# EAGLE board SMART_PJU (EAGLE 9.6.2)
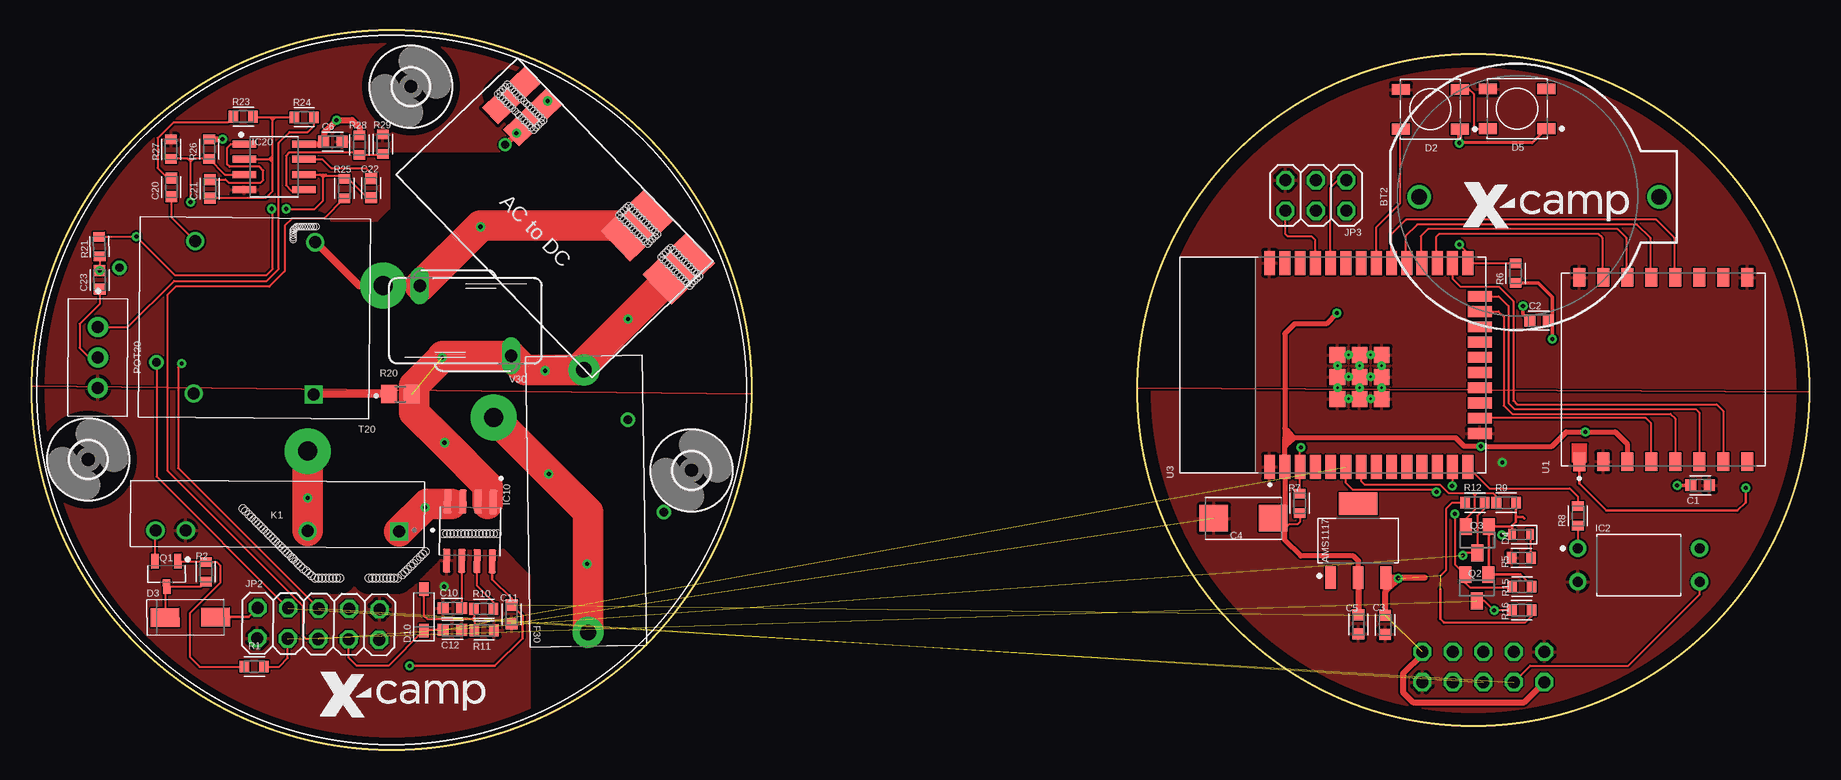
[diagram p0: board, top side]
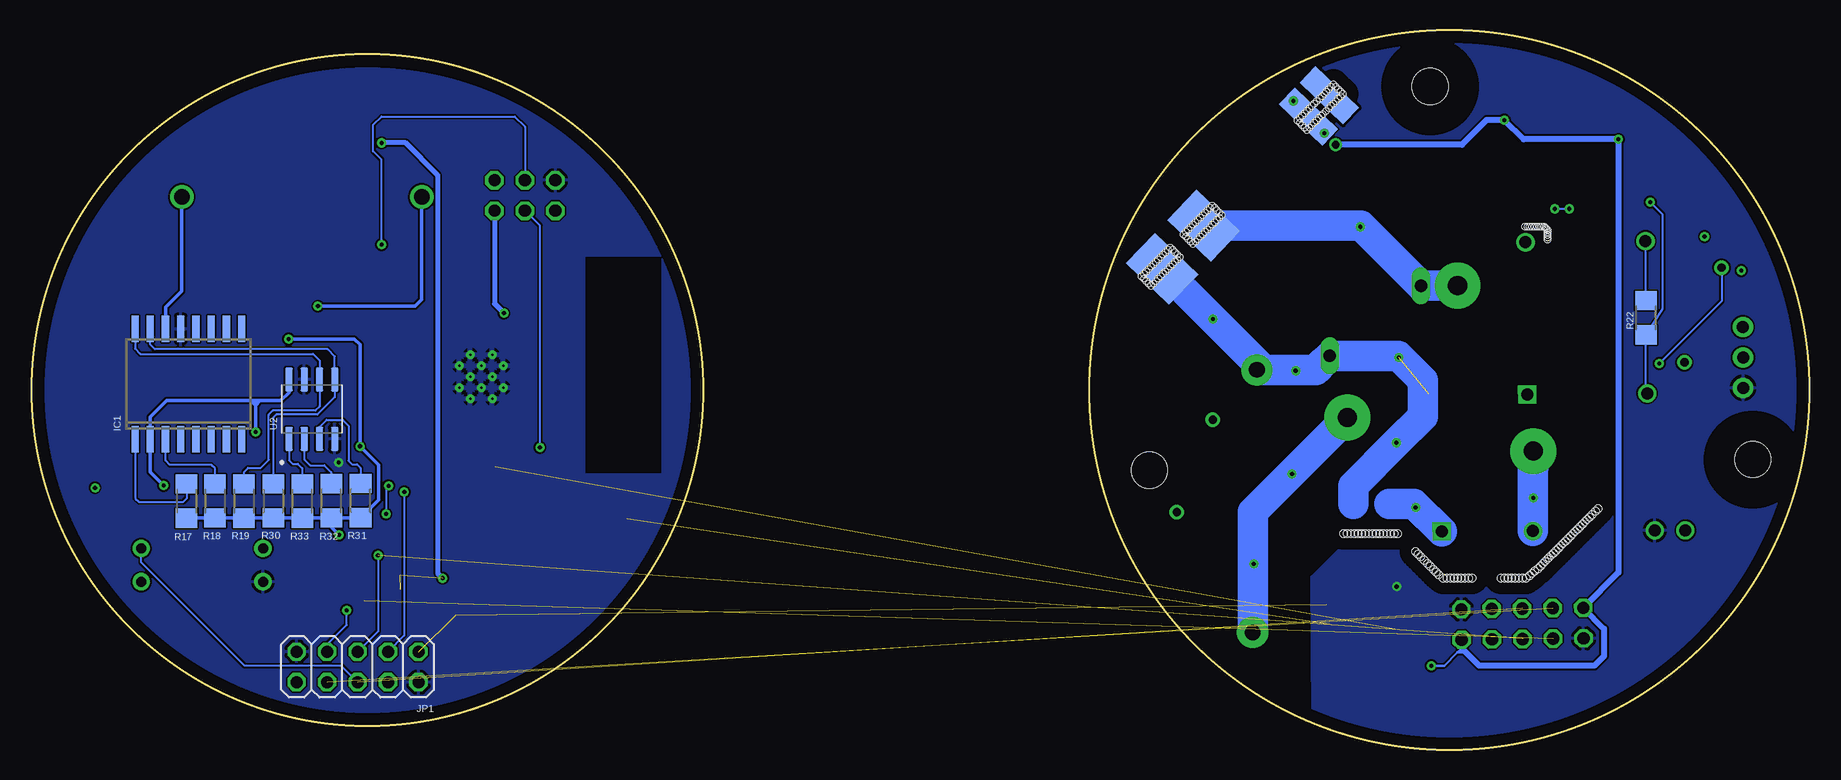
[diagram p1: board, bottom side, seen from below]

Size 148.19 x 60.03 mm. Coordinates in mm from the lower left corner, seen from the top.
Outline: circle at 30.02,30.02 radius 30.02
Outline: circle at 120.19,30.01 radius 28
Copper layers (1*16): Top 0.035mm / dielectric 1.5mm / Bottom 0.035mm
Design rules "default": minimum track width 6mil, minimum drill 0.35mm, track to track 6mil, track to pad 6mil, pad to pad 6mil, via to via 6mil, smd to smd 6mil, copper to edge 40mil, drill to drill 6mil, minimum pad ring 10mil, minimum via ring 8mil, stop-mask expansion 4mil, vias tented up to drill 0mil, thermal gap 10mil
Holes 0.6 mm at 19.52,18.22 19.72,18.02 19.92,17.82 20.12,17.62 20.32,17.42 20.52,17.22 20.72,17.02 20.92,16.82 21.12,16.62 21.32,16.42 21.52,16.22 21.72,16.02 21.84,15.91 22.02,15.72 22.22,15.52 22.42,15.32 22.62,15.12 22.92,14.92 23.12,14.72 23.32,14.52 23.62,14.32 23.92,14.32 24.22,14.32 24.52,14.32 24.82,14.32 25.12,14.32 25.42,14.32 25.72,14.32 28.12,14.32 28.42,14.32 28.72,14.32 29.02,14.32 29.32,14.32 29.62,14.32 29.92,14.32 30.22,14.32 30.52,14.32 30.92,14.62 31.12,14.82 31.32,15.02 31.62,15.32 31.82,15.52 32.12,15.82 32.42,16.12 32.62,16.32 32.82,16.52 17.62,20.12 17.82,19.92 18.12,19.62 18.32,19.42 18.52,19.22 18.72,19.02 18.92,18.82 19.12,18.62 19.32,18.42 34.32,18.02 34.62,18.02 34.92,18.02 35.22,18.02 35.52,18.02 35.82,18.02 36.12,18.02 36.42,18.02 36.72,18.02 37.02,18.02 37.32,18.02 37.62,18.02 37.92,18.02 38.22,18.02 38.52,18.02 38.82,18.02
Holes 0.5 mm at 52.47,41.1 52.67,40.9 52.87,40.7 53.07,40.5 53.27,40.3 53.47,40.1 53.67,39.9 52.67,41.3 52.87,41.5 53.07,41.7 53.27,41.9 53.47,41.7 53.67,41.5 53.87,41.3 54.07,41.1 54.27,40.9 54.47,40.7 54.67,40.5 54.87,40.3 55.07,40.1 55.27,39.9 55.47,39.7 55.67,39.5 53.87,39.7 54.07,39.5 54.27,39.3 54.47,39.1 54.67,38.9 54.87,38.7 55.07,38.9 55.27,39.1 55.47,39.3 48.97,44.6 49.17,44.4 49.37,44.2 49.57,44 49.77,43.8 49.97,43.6 50.17,43.4 49.17,44.8 49.37,45 49.57,45.2 49.77,45.4 49.97,45.2 50.17,45 50.37,44.8 50.57,44.6 50.77,44.4 50.97,44.2 51.17,44 51.37,43.8 51.57,43.6 51.77,43.4 51.97,43.2 52.17,43 50.37,43.2 50.57,43 50.77,42.8 50.97,42.6 51.17,42.4 51.37,42.2 51.57,42.4 51.77,42.6 51.97,42.8 38.87,54.7 39.07,54.5 39.27,54.3 39.47,54.1 39.67,53.9 39.87,53.7 40.67,52.9 39.07,54.9 39.27,55.1 39.47,55.3 39.67,55.5 39.87,55.3 40.07,55.1 40.27,54.9 41.07,54.1 41.27,53.9 41.47,53.7 41.67,53.5 41.87,53.3 42.07,53.1 42.27,52.9 42.47,52.7 42.67,52.5 40.87,52.7 41.07,52.5 41.27,52.3 41.47,52.1 41.67,51.9 41.87,51.7 42.07,51.9 42.27,52.1 42.47,52.3 40.05,53.51 40.3,53.26 40.56,53 40.42,54.72 40.62,54.52 40.82,54.32 21.82,42.54 21.82,42.74 21.82,42.94 21.82,43.14 21.82,43.34 21.92,43.44 22.02,43.54 22.12,43.64 22.32,43.64 22.52,43.64 22.72,43.64 22.92,43.64 23.12,43.64 23.32,43.64 23.52,43.64 23.72,43.64

## Footprints (pad centres in the part's own frame; a part is rotated, then mirrored left to right if it is on the bottom)
SOT230P700X170-4 = smd 1.86 x 0.898: 1 -3.075,2.3; 2 -3.075,0; 3 -3.075,-2.3 | smd 1.86 x 3.189: 4 3.075,0
BATTCOM_20MM_PTH = drill 1.3: 1 11.85,0; 2 -8.15,0
CAPC1608X85 = smd 0.921 x 0.97: 1 -0.775,0; 2 0.775,0
CAPM6032X280 = smd 2.368 x 2.204: 1 -2.471,0; 2 2.471,0
WS2812B = smd 1.5 x 0.9: 1 -2.45,1.65; 2 -2.45,-1.65; 3 2.45,-1.65; 4 2.45,1.65
DIOM5226X290N = smd 2.392 x 1.565: 1 -2.108,0; 2 2.108,0
LEDC1608X55N_FLAT-B = smd 0.612 x 0.912: A 0.75,0; C -0.75,0
SOD3715X135 = smd 1.127 x 0.784: 1 -1.722,0; 2 1.722,0
4527 = drill 1.3 pad 2.6: 1 -10.95,0; 2 10.95,0
3,0 = hole 3: 0,0
SO16W = smd 0.6 x 2.2: 1 -4.445,-4.6; 2 -3.175,-4.6; 3 -1.905,-4.6; 4 -0.635,-4.6; 5 0.635,-4.6; 6 1.905,-4.6; 7 3.175,-4.6; 8 4.445,-4.6; 9 4.445,4.6; 10 3.175,4.6; 11 1.905,4.6; 12 0.635,4.6; 13 -0.635,4.6; 14 -1.905,4.6; 15 -3.175,4.6; 16 -4.445,4.6
DIP1016W60P279L460H460Q4B = drill 0.854 pad 1.454: 1 -5.08,1.395; 2 -5.08,-1.395; 3 5.08,-1.395; 4 5.08,1.395
SOIC127P600X175-8N@1 = smd 1.97 x 0.6: 1 -2.475,1.905; 2 -2.475,0.635; 3 -2.475,-0.635; 4 -2.475,-1.905; 5 2.475,-1.905; 6 2.475,-0.635; 7 2.475,0.635; 8 2.475,1.905
SOIC127P600X175-8N = smd 1.969 x 0.592: 1 -2.474,1.905; 2 -2.474,0.635; 3 -2.474,-0.635; 4 -2.474,-1.905; 5 2.474,-1.905; 6 2.474,-0.635; 7 2.474,0.635; 8 2.474,1.905
2X05 = drill 1.016 octagon: 1 -5.08,-1.27; 2 -5.08,1.27; 3 -2.54,-1.27; 4 -2.54,1.27; 5 0,-1.27; 6 0,1.27; 7 2.54,-1.27; 8 2.54,1.27; 9 5.08,-1.27; 10 5.08,1.27
2X03 = drill 1.016 octagon: 1 -2.54,-1.27; 2 -2.54,1.27; 3 0,-1.27; 4 0,1.27; 5 2.54,-1.27; 6 2.54,1.27
SSR_G3MB-202P = drill 1 square: 1 -10.16,1.4 | drill 1: 2 -2.54,1.4; 3 7.62,1.4; 4 10.16,1.4
NEMA-7P = drill 0.7: DIM+ -22.7,10.2; DIM- -19.6,2.3; OPS1 19.7,-2.5; OPS2 22.7,-10.2 | drill 1.6 pad 3.81: L 8.5,-2.3; N -0.7,8.7; V -7,-5.1
PV36W = drill 1 pad 1.7: 1 0,0; 2 2.54,0; 3 5.08,0
AC-DC_3.5W(VER) = smd 1.9 x 5 bottom: 5V_B -7.2,3.8; GND_B -9.7,3.8 | smd 1.9 x 5: 5V_T -7.16,3.8; GND_T -9.7,3.8 | smd 3.5 x 5 bottom: L_B 10.4,3.8; N_B 5.4,3.8 | smd 3.5 x 5: L_T 10.4,3.8; N_T 5.4,3.8
SOT95P237X112-3N = smd 1.224 x 0.625: 1 -1.064,0.95; 2 -1.064,-0.95; 3 1.064,0
SOT23 = smd 1 x 1.4: 1 -0.95,-1.1; 2 0.95,-1.1; 3 0,1.1
RESC1608X60 = smd 0.799 x 0.974: 1 -0.815,0; 2 0.815,0
R1206 = smd 1.6 x 1.803: 1 -1.422,0; 2 1.422,0
R0805 = smd 1.3 x 1.5: 1 -0.95,0; 2 0.95,0
ZMPT101B = drill 1 square: 1 -5,6.35 | drill 1: 2 -5,-6.35; 3 5,-6.35; 4 5,6.35
RA-01H = smd 1.536 x 1: 1 -7.682,7; 2 -7.682,5; 3 -7.682,3; 4 -7.682,1; 5 -7.682,-1; 6 -7.682,-3; 7 -7.682,-5; 8 -7.682,-7; 9 7.682,-7; 10 7.682,-5; 11 7.682,-3; 12 7.682,-1; 13 7.682,1; 14 7.682,3; 15 7.682,5; 16 7.682,7
SOIC127P600X175-8N' = smd 1.97 x 0.6: 1 -2.475,1.905; 2 -2.475,0.635; 3 -2.475,-0.635; 4 -2.475,-1.905; 5 2.475,-1.905; 6 2.475,-0.635; 7 2.475,0.635; 8 2.475,1.905
MODULE_ESP32-WROOM-32 = smd 2 x 0.9: 1 -8.5,5.26; 2 -8.5,3.99; 3 -8.5,2.72; 4 -8.5,1.45; 5 -8.5,0.18; 6 -8.5,-1.09; 7 -8.5,-2.36; 8 -8.5,-3.63; 9 -8.5,-4.9; 10 -8.5,-6.17; 11 -8.5,-7.44; 12 -8.5,-8.71; 13 -8.5,-9.98; 14 -8.5,-11.25; 25 8.5,-11.25; 26 8.5,-9.98; 27 8.5,-8.71; 28 8.5,-7.44; 29 8.5,-6.17; 30 8.5,-4.9; 31 8.5,-3.63; 32 8.5,-2.36; 33 8.5,-1.09; 34 8.5,0.18; 35 8.5,1.45; 36 8.5,2.72; 37 8.5,3.99; 38 8.5,5.26 | smd 0.9 x 2: 15 -5.715,-12.25; 16 -4.445,-12.25; 17 -3.175,-12.25; 18 -1.905,-12.25; 19 -0.635,-12.25; 20 0.635,-12.25; 21 1.905,-12.25; 22 3.175,-12.25; 23 4.445,-12.25; 24 5.715,-12.25 | smd 1.33 x 1.33: 39_1 -2.835,-0.405; 39_2 -1,-0.405; 39_3 0.835,-0.405; 39_4 -2.835,-2.24; 39_5 -1,-2.24; 39_6 0.835,-2.24; 39_7 -2.835,-4.075; 39_8 -1,-4.075; 39_9 0.835,-4.075 | drill 0.2 pad 0.3: 39_10 -1.917,-0.405; 39_11 -0.083,-0.405; 39_12 -2.835,-1.323; 39_13 -1,-1.323; 39_14 0.835,-1.323; 39_15 -1.917,-2.24; 39_16 -0.083,-2.24; 39_17 -2.835,-3.158; 39_18 -1,-3.158; 39_19 0.835,-3.158; 39_20 -1.917,-4.075; 39_21 -0.083,-4.075
MOV-10D561 = drill 1.016 long: 1 -2.921,-3.81; 2 2.921,3.81

## Placement (x,y rotation side)
AMS1117  NCP1117ST33T3G  [SOT230P700X170-4]  110.59,17.45 90 top
BT2  [BATTCOM_20MM_PTH]  123.82,46.12 0 top
C1  1μ  [CAPC1608X85]  139.09,22.06 0 top
C2  0.1μ  [CAPC1608X85]  125.66,35.8 180 top
C3  10µ  [CAPC1608X85]  112.83,10.43 270 top
C4  100µ  [CAPM6032X280]  101.02,19.32 180 top
C5  10µ  [CAPC1608X85]  110.6,10.47 270 top
C6  100p  [CAPC1608X85]  25.12,50.72 180 top
C10  1n  [CAPC1608X85]  35.07,11.82 180 top
C11  0.1μ  [CAPC1608X85]  40.02,11.3 270 top
C12  0.1µ  [CAPC1608X85]  35.09,10.01 0 top
C20  1µ  [CAPC1608X85]  11.65,46.92 90 top
C21  100p  [CAPC1608X85]  14.86,46.79 90 top
C22  100p  [CAPC1608X85]  28.3,46.84 270 top
C23  1µ  [CAPC1608X85]  5.68,39.19 90.4 top
D2  WS2812B  [WS2812B]  116.6,53.42 180 top
D3  DIODE  [DIOM5226X290N]  13.24,11.06 0.6 top
D4  LED_BLUE  [LEDC1608X55N_FLAT-B]  124.17,17.96 180 top
D5  WS2812B  [WS2812B]  123.83,53.47 180 top
D10  1N4448W  [SOD3715X135]  32.7,11.69 90 top
F30  4527  [4527]  46.22,20.74 90.9 top
H1  HOLE3.0  [3,0]  4.72,24.22 0 top
H2  HOLE3.0  [3,0]  31.62,55.32 0 top
H4  HOLE3.0  [3,0]  55.02,23.32 0 top
IC1  DS3231/SO  [SO16W]  135.12,30.51 0 bottom
IC2  FOD817BSD  [DIP1016W60P279L460H460Q4B]  133.97,15.41 0 top
IC10  ACS712ELCTR-05B-T  [SOIC127P600X175-8N@1]  36.55,18.23 269 top
IC20  LM358_SOIC  [SOIC127P600X175-8N]  20.22,48.62 0 top
JP1  PINHD-2X5  [2X05]  121.02,6.92 180 bottom
JP2  PINHD-2X5  [2X05]  23.92,10.52 359.3 top
JP3  PINHD-2X3  [2X03]  107.06,46.23 180 top
K1  SSR  [SSR_G3MB-202P]  20.5,19.66 179.7 top
NEMA-7PIN  NEMA-7P  [NEMA-7P]  30.02,30.02 0 top
POT20  100K  [PV36W]  5.54,35.26 269.8 top
PS1  HI-LINKVERTICAL  [AC-DC_3.5W(VER)]  44,44.97 313.9 top
Q1  PNP  [SOT95P237X112-3N]  11.26,14.68 270.8 top
Q2  NMOSFET  [SOT23]  120.46,13.52 180 top
Q3  NMOSFET  [SOT23]  120.52,17.52 180 top
R1  10k  [RESC1608X60]  18.57,6.94 0 top
R2  10k  [RESC1608X60]  14.53,14.85 270 top
R5  100  [RESC1608X60]  124.19,16.01 180 top
R6  10k  [RESC1608X60]  123.7,39.75 270 top
R7  10k  [RESC1608X60]  105.71,20.57 270 top
R8  100  [RESC1608X60]  128.9,19.51 90 top
R9  10k  [RESC1608X60]  122.92,20.62 0 top
R10  2k  [RESC1608X60]  37.7,11.76 180 top
R11  10k  [RESC1608X60]  37.73,9.97 180 top
R12  10k  [RESC1608X60]  120.32,20.62 180 top
R15  10k  [RESC1608X60]  124.24,13.63 0 top
R16  10k  [RESC1608X60]  124.21,11.65 0 top
R17  10k  [R1206]  135.27,20.75 90 bottom
R18  10k  [R1206]  132.89,20.76 90 bottom
R19  10k  [R1206]  130.48,20.75 90 bottom
R20  820K  [R0805]  30.76,29.66 0 top
R21  10k  [RESC1608X60]  5.65,41.98 91.4 top
R22  100  [R1206]  13.62,36.04 270 bottom
R23  10k  [RESC1608X60]  17.65,52.81 0 top
R24  100K  [RESC1608X60]  22.73,52.75 0 top
R25  100K  [RESC1608X60]  26.08,46.82 270 top
R26  10k  [RESC1608X60]  14.81,50.1 90 top
R27  10k  [RESC1608X60]  11.63,50.09 270 top
R28  10k  [RESC1608X60]  27.33,50.44 90 top
R29  10k  [RESC1608X60]  29.28,50.51 270 top
R30  10k  [R1206]  128.04,20.76 90 bottom
R31  10k  [R1206]  120.76,20.79 270 bottom
R32  10k  [R1206]  123.21,20.78 270 bottom
R33  10k  [R1206]  125.62,20.75 270 bottom
T20  ZMPT101B  [ZMPT101B]  18.59,36.03 179.4 top
U1  RA-01H  [RA-01H]  136.02,31.72 90 top
U2  AT24C64N-10SC  [SOIC127P600X175-8N']  124.82,28.42 90 bottom
U3  ESP32-WROOM-32  [MODULE_ESP32-WROOM-32]  108.46,32.11 90 top
V30  10D471K  [MOV-10D561]  36.18,35.79 90 top

## Library data of the parts
AMS1117 = IC_Power-Management; CATEGORY: IC_Power-Management; MANUFACTURER: ON Semiconductor; MPN: NCP1117ST33T3G; OPERATING_TEMP: 0 to +125 °C; PART_STATUS: Active; ROHS_COMPLIANT: RoHS3 Compliant; SERIES: NCP1117, NCV1117; SUB-CATEGORY: Voltage Regulator; TYPE: Linear
BT2 = SparkFun-Batteries; PROD_ID: BATT-09031; SF_SKU: PRT-00783
C1-C6 C10-C12 C20-C23 = Capacitor; CATEGORY: Capacitor
D2 D5 = LED; CATEGORY: LED; COLOR: RGB; DESCRIPTION: LED integrated light source; MANUFACTURER: Worldsemi; MPN: WS2812B; OPERATING_TEMP: -25 ℃ to +80℃(TJ); PART_STATUS: Active; SUB_CATEGORY: RGB
D3 = Diode; CATEGORY: Diode; SUB-CATEGORY: Rectifier
D4 = LED; CATEGORY: LED; COLOR: BLUE; DESCRIPTION: CHIP LED FLAT; SUB-CATEGORY: CHIP; TYPE: FLAT_TOP
D10 = Diode; CATEGORY: Diode; DESCRIPTION: DIODE GEN PURP 100V 300MA SOD123; MANUFACTURER: Diodes Incorporated; SUB-CATEGORY: Rectifier
F30 = Fuse Holder; CREATED_BY: PCBLayout.com; DIGIKEY_PN: 36-4527-ND; MANUFACTURER: Keystone Electronics; MPN: 4527
H1 H2 H4 = holes
IC1 IC10 NEMA-7PIN PS1 V30 = XLKM#4
IC2 = Opto-Electronic; CATEGORY: Opto-Electronic; MANUFACTURER: ON Semiconductor; MPN: FOD817BSD; OPERATING_TEMP: -55 to +110 °C; PART_STATUS: Active; ROHS_COMPLIANT: RoHS3 Compliant; SUB-CATEGORY: OptoCoupler; THERMALLOSS: 0.2W
IC20 = IC_Linear; CATEGORY: Amplifier; DESCRIPTION: Dual Operational Amplifier; MANUFACTURER: Generic; MPN: Generic; SERIES: LM358; SUB-CATEGORY: OpAmp; TYPE: Dual
JP1-JP3 = Connector; CATEGORY: CONNECTOR; SUB-CATEGORY: PIN-HEADER
K1 = XLKM#4; MANUFACTURER: Omron; PARTREV: N/A; STANDARD: Manufacturer Recommendation
POT20 = Resistor; CATEGORY: Resistor; DESCRIPTION: Lead Sealed Type Multiturn PV36 Series; MANUFACTURER: BOURNS; MPN: PV36W; OPERATING_TEMPERATURE: -55 to +125 °C; PART_STATUS: Active; ROHS_COMPLIANCE: RoHS Compliant; SERIES: PV36; SUB-CATEGORY: Trimpot; TYPE: Lead Sealed
Q1 = Transistor; CATEGORY: Transistor; SUB-CATEGORY: BJT; TYPE: PNP
Q2 Q3 = Transistor; CATEGORY: Transistor; SUB-CATEGORY: MOSFET; TYPE: N-Channel
R1 R2 R5-R12 R15 R16 R21 R23-R29 = Resistor; CATEGORY: Resistor; SUB-CATEGORY: Fixed
R17-R20 R22 R30-R33 = rcl; SPICEPREFIX: R
T20 = XLKM#4; MANUFACTURER: Qingxian Zeming Langxi Electronic; MAXIMUM_PACKAGE_HEIGHT: 18.8mm; PARTREV: NA; STANDARD: Manufacturer Recommendations
U1 = XLKM#4; MANUFACTURER: AI-Thinker; MAXIMUM_PACKAGE_HEIGHT: 3.4mm; PARTREV: V1.0; STANDARD: Manufacturer Recommendations
U2 = XLKM#4; MPN: AT24C64N-10SC; OC_FARNELL: 1362658; OC_NEWARK: -; PACKAGE: SOIC-8; SUPPLIER: Atmel
U3 = XLKM#4; MANUFACTURER: Espressif Systems; MAXIMUM_PACKAGE_HEIGHT: 3.2 mm; PARTREV: 2.9; STANDARD: Manufacturer Recommendations

## Nets
5V: AMS1117.3 C3.1 C6.2 C11.1 D3.2 IC10.8 IC20.8 JP1.1 JP1.10 JP2.2 JP2.9 PS1.5V_B PS1.5V_T R26.2 R28.2
+3.3V: AMS1117.2 C1.1 C2.1 C4.1 C5.1 D4.A IC1.2 JP3.2 Q2.1 Q3.1 R6.2 R7.2 R9.2 R15.2 R17.1 R18.1 R19.1 R30.1 R31.2 R32.2 R33.2 U1.3 U2.8 U3.2
ADC_CURRENT: C12.1 D10.1 JP1.3 JP2.7 U3.6
ADC_VOLTAGE: JP1.5 JP2.5 Q3.3 R12.1 R25.2
ADC_VOLTAGE_3V3: Q3.2 R9.1 U3.7
ANT: U1.1
BOOT: JP3.3 R6.1 U3.25
DIM+: IC2.4 JP1.6 JP2.6 NEMA-7PIN.DIM+
DIM-: IC2.3 JP1.8 JP2.4 NEMA-7PIN.DIM-
DIO0: U1.5 U3.23
DIO1: U1.6 U3.24
DIO2: U1.7 U3.26
EN: JP3.4 R7.1 U3.3
GND: C1.2 C3.2 C4.2 C5.2 C6.1 C10.2 C11.2 C12.2 D2.3 D5.3 IC1.13 IC2.2 IC10.5 IC20.4 JP1.2 JP1.9 JP2.1 JP2.10 JP3.5 K1.3 POT20.3 PS1.GND_B PS1.GND_T R5.2 R11.1 R27.1 R29.1 U1.2 U1.9 U1.16 U2.4 U2.7 U3.1 U3.15 U3.38 U3.39_1 U3.39_2 U3.39_3 U3.39_4 U3.39_5 U3.39_6 U3.39_7 U3.39_8 U3.39_9 U3.39_10 U3.39_11 U3.39_12 U3.39_13 U3.39_14 U3.39_15 U3.39_16 U3.39_17 U3.39_18 U3.39_19 U3.39_20 U3.39_21
IO_RELAY: JP1.7 JP2.3 Q2.3 R1.2 R16.1
IO_RELAY_3V3: Q2.2 R15.1 U3.13
L: F30.1 NEMA-7PIN.L
L_FUSE: F30.2 IC10.1 IC10.2 PS1.L_B PS1.L_T R20.2 V30.1
L_OUT: IC10.3 IC10.4 K1.1
L_ZMPT: R20.1 T20.1
LED: D2.4 U3.31
MISO: U1.13 U3.29
MOSI: U1.14 U3.28
N: NEMA-7PIN.N PS1.N_B PS1.N_T T20.2 V30.2
N$1: C20.1 R22.1 T20.3
N$2: C21.2 IC20.1
N$3: C20.2 R23.1
N$4: IC10.7 R10.1
N$5: R33.1 U2.1
N$6: R32.1 U2.2
N$7: C22.1 IC20.7
N$8: C21.1 IC20.2 R23.2 R24.1
N$9: D10.2 R10.2 R11.2
N$10: R31.1 U2.3
N$11: C10.1 IC10.6
N$12: D3.1 Q1.3 R2.2
N$13: Q1.1 R1.1 R2.1
N$14: D2.2 D5.4
N$15: K1.4 Q1.2
N$16: C22.2 IC20.6 R21.2 R25.1
N$17: C23.2 R21.1
N$18: C23.1 POT20.2
N$19: BT2.1 IC1.14
N$20: IC1.3 R18.2
N$21: IC1.1 R17.2
N$23: BT2.2 C2.2
N$25: D4.C R5.1
N$26: IC2.1 R8.1
N$33: AMS1117.1
N$39: U3.33
N$40: U3.36
N$41: U3.37
N$42: U3.10
N$43: U3.11
N$44: U3.12
N$45: U3.8
N$46: U3.9
NSS: U1.15 U3.27
OUT-A: POT20.1 R24.2
POS-A: IC20.3 R22.2 R26.1 R27.2 T20.4
POS-B: IC20.5 R28.1 R29.2
PWM_DIM: R8.2 U3.14
RESET: U1.4 U3.16
RX0: JP3.1 U3.34
SCK: U1.12 U3.30
SCL: IC1.16 R19.2 U2.6
SDA: IC1.15 R30.2 U2.5
TX0: JP3.6 U3.35
V: K1.2 NEMA-7PIN.V
VIN: D2.1 D5.1 R12.2 R16.2

## Tracks (layer width: path | path; a pad name or v marks a point on that pad's centre or on a via)
5V  (via drill 0.35, 0.65)  (2 unrouted)
  Top 0.152: PS1.5V_T 42.43,53.42 42.52,53.42 42.52,53.22 42.72,53.22 | 41.72,52.71 41.57,52.56 | 114.01,14.38 113.32,14.38 113.32,14.12 113.54,13.89
  Top 0.2: IC10.8 38.41,14.23 40.02,12.62 C11.1 40.26,12.08 | D3.2 18.09,11.08 JP2.2
  Top 0.203: C11.1 40.92,11.18 40.92,9.32 38.62,7.02 v31.52,7.02
  Top 0.406: AMS1117.3 114.01,14.38 114.02,14.37
  Top 0.508: 116.27,8.52 JP1.1 115.94,7.99 114.32,6.37 114.32,4.82 115.15,3.99 124.44,3.99 JP1.10 | 22.74,50.47 IC20.8 24.15,50.52 C6.2 24.42,50.79 24.42,51.52 v25.42,52.52 26.72,52.52 27.33,51.9 R28.2 | R26.2 v15.92,50.92 | 40.42,51.4 v39.48,50.47 | 40.42,51.4 v40.42,51.42 | v43.02,54.12 41.78,52.88 PS1.5V_T | PS1.5V_T 41.72,52.71 | PS1.5V_T 40.42,51.4 | 112.87,13.22 AMS1117.3 113.32,14.38 114.02,14.38 | C3.1 112.87,13.22 | 114.02,14.38 116.11,14.38 | 112.87,13.22 113.54,13.89 114.02,14.37 114.02,14.38
  Bottom 0.2: PS1.5V_B v43.02,54.12
  Bottom 0.203: v31.52,7.02 30.44,7.02 29.33,8.13 | 29.33,8.13 28.98,8.48 | 29.33,8.13 28.7,8.13 28.67,8.17
  Bottom 0.508: JP2.9 28.98,8.48 28.67,8.17 27.52,7.02 17.92,7.02 17.12,7.82 17.12,10.11 JP2.2 15.92,14.78 v15.92,50.92 23.82,50.92 v25.42,52.52 26.92,52.52 28.96,50.47 v39.48,50.47
+3.3V  (via drill 0.35)
  Top 0.152: R7.2 105.71,19.01 105.52,18.82 104.82,18.82 104.52,18.52 104.47,18.52 | Q3.1 121.67,18.42 | 125.05,13.68 R15.2 | 121.51,14.72 121.46,14.67 Q2.1
  Top 0.203: 123.73,19.42 123.73,19.03 123.42,18.72 | 123.73,19.42 R9.2 | 123.42,18.72 123.32,18.62 Q3.1 121.47,14.67 121.46,14.67 | D4.A 123.42,18.72 | Q2.1 124.11,14.62 125.05,13.68 | 123.73,19.42 124.32,19.42 124.42,19.32
  Top 0.305: R6.2 125.6,38.94 126.78,37.75 126.78,35.82 | 104.47,19.23 C4.1 | v122.55,17.93 123.38,17.93 D4.A | v137.17,22.05 v137.17,22.06 C1.1 | 126.78,35.82 126.78,34.29 v126.77,34.27 | C2.1 126.46,35.82 126.78,35.82
  Top 0.406: AMS1117.2 110.59,15.78 | 110.59,15.78 110.19,16.18 105.79,16.18 104.47,17.49 104.47,18.52 104.47,19.23 | 104.47,25.27 U3.2 104.47,19.96 C4.1 | 104.47,25.27 104.82,25.62 | 104.82,25.62 105.22,26.02 | 105.22,26.02 118.72,26.02 119.42,25.32 v120.82,25.32 126.72,25.32 127.92,26.52 v129.52,26.52 132.02,26.52 133.02,25.52 U1.3 | v108.82,36.42 107.92,35.52 105.27,35.52 104.47,34.72 104.47,26.82 | 104.47,26.82 104.47,26.02 | 104.47,25.27 104.47,26.02 | 105.22,26.02 105.22,26.07 104.8,26.5 | 104.8,26.5 104.47,26.82 | 104.47,26.02 105.22,26.02 | 104.8,26.5 104.8,25.64 104.82,25.62 | 110.59,15.78 110.62,15.78
  Top 0.508: AMS1117.2 C5.1
  Bottom 0.305: U2.8 126.72,29.81 127.42,29.12 129.12,29.12 | 129.12,29.12 129.52,29.12 | 129.52,29.12 129.92,29.12 | 129.92,29.12 136.92,29.12 138.29,27.74 IC1.2 | v129.52,26.52 129.52,28.72 | 129.52,29.12 129.52,28.72 | 129.12,29.12 129.52,28.72 | 129.52,28.72 129.92,29.12 | R32.2 R31.2 119.27,20.86 119.27,23.77 v120.82,25.32 120.83,25.3 120.83,25.29 120.82,25.3 120.82,33.78 121.3,34.27 v126.77,34.27 | R32.2 125.59,19.35 R33.2 128.02,19.33 R30.1 130.47,19.34 R19.1 R18.1 135.26,19.34 R17.1 | IC1.2 | R32.2 123.21,18.59 v122.55,17.93 | IC1.2 138.29,23.18 v137.17,22.05
  Bottom 0.406: JP3.2 109.6,37.2 v108.82,36.42
ADC_CURRENT  (via drill 0.35)  (1 unrouted)
  Top 0.152: C12.1 32.74,10.01 D10.1 29.75,7.02 27.12,7.02 26.44,7.69 JP2.7 | U3.6 109.55,22.28 110.12,21.72 116.91,21.72 v117.12,21.51
  Bottom 0.152: v117.12,21.51 117.12,9.55 JP1.3
ADC_VOLTAGE  (via drill 0.35)  (1 unrouted)
  Top 0.152: R25.2 24.39,44.32 21.72,44.32 21.12,43.72 21.12,39.92 19.82,38.62 12.02,38.62 11.32,37.92 11.32,23.3 22.35,12.26 22.35,12.25 22.59,12.02 22.59,9.55 22.89,9.25 JP2.5 | R12.1 121.13,20.13 120.52,19.52 Q3.3 119.52,16.42 v119.32,16.22
  Bottom 0.152: v119.32,16.22 119.32,9.89 JP1.5
ADC_VOLTAGE_3V3
  Top 0.152: U3.7 110.82,22.41 111.11,22.12 117.41,22.12 118.12,21.42 120.12,21.42 | R9.1 122.06,20.57 122.06,21.17 121.82,21.42 120.52,21.42 | 120.12,21.42 120.52,21.42 | Q3.2 119.57,19.27 120.32,20.02 120.32,21.22 | 120.32,21.22 120.27,21.27 | 120.27,21.27 120.12,21.42 | 120.32,21.22 120.37,21.27 | 120.37,21.27 120.52,21.42 | 120.37,21.27 120.27,21.27
ANT  (via drill 0.35)
  Top 0.203: U1.1 129.02,22.21 131.27,19.95 142.2,19.95 142.9,20.65 v142.9,21.86
BOOT  (via drill 0.35)
  Top 0.152: R6.1 123.66,40.61 U3.25 119.71,41.44 v119.02,42.14
  Top 0.305: 119.76,40.57 U3.25
  Bottom 0.152: v119.02,42.14 119.02,49.22 119.72,49.92 119.72,52.12 119.02,52.82 107.92,52.82 107.06,51.96 JP3.3
DIM+  (via drill 0.35)  (1 unrouted)
  Top 0.152: v12.52,32.22 12.22,31.92 12.22,23.5 JP2.6
  Bottom 0.152: JP1.6 122.39,7.02 130.41,7.02 139.05,15.66 IC2.4 | NEMA-7PIN.DIM+ 7.32,37.42 v12.52,32.22
DIM-  (1 unrouted)
  Top 0.152: JP1.8 124.93,7.02 133.12,7.02 139.05,12.95 IC2.3 | NEMA-7PIN.DIM- 10.42,22.79 JP2.4
DIO0
  Top 0.152: U3.23 122.28,36.55 122.72,36.12 122.72,28.72 123.42,28.02 136.62,28.02 137.02,27.62 U1.5
DIO1
  Top 0.152: 139.12,24.13 U1.6 139.02,28.12 138.72,28.42 123.62,28.42 123.12,28.92 123.12,37.02 122.31,37.82 U3.24
DIO2
  Top 0.152: U3.26 118.44,39.29 119.12,38.62 122.32,38.62 123.52,37.42 123.52,29.12 123.82,28.82 140.46,28.82 141.02,28.26 U1.7 141.22,24.23
EN  (via drill 0.35)
  Top 0.152: R7.1 105.74,21.42 U3.3 105.74,25.14 v105.82,25.22
  Bottom 0.152: v105.82,25.22 105.82,43.71 JP3.4
GND  (via drill 0.35)  (1 unrouted)
  other vias: 122.6,23.97 34.4,13.62
  pour Top: 117.65,2.19 120.02,2.09 122.38,2.19 124.74,2.49 127.05,2.99 129.32,3.69 131.52,4.57 133.63,5.64 135.65,6.88 137.56,8.29 139.34,9.86 140.98,11.57 142.47,13.41 143.79,15.38 144.95,17.45 145.93,19.61 146.72,21.84 147.31,24.13 147.71,26.47 147.92,28.83 147.92,31.2 147.71,33.56 147.31,35.9 146.72,38.19 145.93,40.43 144.95,42.59 143.79,44.66 142.47,46.62 140.98,48.47 139.34,50.18 137.56,51.74 135.65,53.15 133.63,54.39 131.52,55.46 129.32,56.35 127.05,57.04 124.74,57.54 122.38,57.84 120.02,57.94 117.65,57.84 115.3,57.54 112.98,57.04 110.71,56.35 108.51,55.46 106.4,54.39 104.38,53.15 102.47,51.74 100.7,50.18 99.06,48.47 97.57,46.62 96.24,44.66 95.08,42.59 94.11,40.43 93.32,38.19 92.72,35.9 92.32,33.56 92.12,31.2 92.12,28.83 92.32,26.47 92.72,24.13 93.32,21.84 94.11,19.61 95.06,17.51 97.77,13.49 99.26,11.65 102.47,8.29 104.38,6.88 106.4,5.64 108.51,4.57 110.71,3.69 112.98,2.99 115.3,2.49
  pour Bottom: 108.22,33.62 108.22,28.72 113.12,28.72 113.12,33.62
  pour Top: 45.52,55.02 40.42,49.92 29.82,49.92 29.82,45.12 28.82,44.12 21.87,44.12 21.38,39.78 20.02,38.42 17.02,38.42 16.32,37.72 16.32,20.12 22.92,13.52 30.62,13.52 34.22,17.12 38.92,17.12 41.52,14.52 41.52,2.92 41.32,2.72 arc-19 40.62,2.22 arc-14 37.42,1.12 arc-20 25.19,0.74 arc-196 41.8,57.04 arc7 44.62,55.72 45.52,55.12
  pour Bottom: 41.42,2.82 37.92,1.52 arc-25 29.42,0.32 arc-7 22.87,1.21 arc-204 45.82,55.22 40.42,49.82 30.02,49.82 29.92,49.92 29.82,49.82 29.82,45.22 28.72,44.12 21.82,44.12 21.32,43.62 21.32,39.72 20.02,38.42 17.02,38.42 16.32,37.72 16.32,20.02 22.82,13.52 30.62,13.52 34.22,17.12 38.82,17.12 41.52,14.42
  pour Bottom: 120.22,58.02 120.72,58.02 arc-180 120.62,2.12 arc-179
IO_RELAY  (via drill 0.35)  (1 unrouted)
  Top 0.152: R1.2 20.64,6.94 21.36,7.66 JP2.3 | R16.1 v121.92,11.65 121.88,11.65 121.11,12.42 Q2.3
  Bottom 0.152: JP1.7 123.42,8.33 123.42,8.92 121.92,10.42 v121.92,11.65
IO_RELAY_3V3  (via drill 0.35)
  Top 0.152: R15.1 123.31,13.52 119.92,13.52 119.51,13.92 Q2.2 118.64,15.49 v118.64,19.67 | v118.42,22.02 118.42,23.58 U3.13
  Bottom 0.152: v118.42,22.02 118.64,21.8 v118.64,19.67
L  (via drill 0.35)
  Top 0.305: v46.32,15.52 46.4,15.44 46.4,15.42
  Top 2.54: NEMA-7PIN.L 46.4,19.84 46.4,15.42 F30.1
  Bottom 2.54: F30.1 46.4,19.84 39.22,27.02 38.92,27.02
L_FUSE  (via drill 0.35)  (2 unrouted)
  Top 0.305: 38.02,20.52 38.34,20.52 IC10.1 | v42.82,31.62 41.23,31.62 41.16,31.69 | v49.72,35.92 50.8,37 50.84,37 | v34.22,32.72 34.22,32.82 34.26,32.86
  Top 0.406: IC10.2 38.47,20.7 IC10.1
  Top 2.54: 38.02,20.52 38.02,22.02 v34.42,25.62 31.88,28.15 31.88,30.38 v34.22,32.72 | 34.26,32.86 V30.1 41.16,31.69 F30.2 46.05,32.21 50.84,37 PS1.L_T
  Bottom 2.54: 51.89,38.09 46.05,32.25 F30.2 41.14,31.69 40.42,32.42 | V30.1 34.26,32.86 32.22,30.82 32.22,27.82 v34.42,25.62 38.02,22.02 38.02,20.52
L_OUT  (via drill 0.35)
  Top 0.305: v32.82,20.22 33.12,20.52 35.02,20.52
  Top 0.406: IC10.4 34.79,20.74 35.02,20.52 35.71,20.52 35.93,20.74
  Top 0.508: IC10.4 35.93,20.74 IC10.3
  Top 2.54: K1.1 32.96,20.52 35.02,20.52
  Bottom 2.54: K1.1 32.96,20.52 35.02,20.52
L_ZMPT
  Top 0.61: R20.1 23.56,29.66 T20.1
LED
  Top 0.152: U3.31 112.09,43.59 114.05,45.55 114.05,51.67 D2.4
MISO
  Top 0.152: U1.13 134.92,39.5 134.92,42.72 133.82,43.82 115.52,43.82 114.53,42.83 114.53,40.71 U3.29
MOSI
  Top 0.152: U1.14 132.92,39.5 132.92,42.72 132.22,43.42 116.39,43.42 115.8,42.84 115.8,40.71 U3.28
N  (via drill 0.35)
  Top 0.61: T20.2 23.68,42.33 27.29,38.72 NEMA-7PIN.N
  Top 2.54: PS1.N_T 37.37,43.71 V30.2 32.51,38.71 v37.42,43.62
  Bottom 2.54: PS1.N_T 37.37,43.71 V30.2 NEMA-7PIN.N
N$1
  Top 0.152: C20.1 11.65,44.44 T20.3
  Bottom 0.152: R22.1 13.62,42.4 T20.3
N$2
  Top 0.152: C21.2 16.17,47.56 16.42,47.32 19.12,47.32 19.32,47.52 19.32,48.32 19.02,48.62 16.52,48.62 16.32,48.82 16.32,50.22 16.62,50.52 IC20.1
N$3
  Top 0.152: R23.1 16.34,52.31 11.81,52.31 10.52,51.02 10.52,48.52 11.34,47.69 C20.2
N$4
  Top 0.152: IC10.7 37.14,13.69 38.51,12.32 R10.1
N$5
  Bottom 0.152: U2.1 126.72,24.14 126.43,23.86 125.99,23.86 125.62,23.48 R33.1
N$6
  Bottom 0.152: U2.2 125.45,24.22 124.96,23.73 123.79,23.73 123.21,23.15 R32.1
N$7
  Top 0.152: IC20.7 24.24,49.25 24.98,48.52 27.9,48.52 28.3,48.11 C22.1
N$8
  Top 0.152: R23.2 18.53,52.75 19.86,52.75 | 19.86,52.75 20.11,52.75 | 20.11,52.75 20.35,52.75 | 20.35,52.75 R24.1 | IC20.2 19.79,49.25 | 20.11,52.52 20.11,52.5 20.05,52.55 | 20.11,52.52 20.11,52.75 | 20.11,52.52 20.35,52.75 | 20.05,52.55 19.86,52.75 | C21.1 19.52,46.02 20.05,46.55 20.05,49.02 | 20.05,52.55 20.05,49.52 | 20.05,49.52 20.05,49.19 | 20.05,49.19 20.05,49.02 | 19.79,49.25 19.82,49.25 | 19.82,49.25 20.05,49.02 | 19.79,49.25 20.05,49.52 | 19.82,49.25 20,49.25 20.05,49.19
N$9
  Top 0.152: 36.91,10.72 R11.2 | 36.91,10.92 36.91,11.12 | 36.91,11.12 36.91,11.73 R10.2 | 36.72,10.92 33.02,10.92 32.7,11.23 D10.2 | 36.91,11.12 36.72,10.92 | 36.72,10.92 36.77,10.87 36.91,10.72 | 36.91,10.92 36.91,10.72 | 36.72,10.92 36.91,10.92
N$10
  Bottom 0.152: U2.3 124.18,26.95 123.6,27.53 122.26,27.53 121.76,27.03 121.76,24.1 121.47,23.81 121.06,23.81 120.76,23.51 R31.1
N$11
  Top 0.152: IC10.6 35.84,15.74 C10.1
N$12
  Top 0.152: R2.2 14.1,13.61 Q1.3 11.13,13.47 D3.1
N$13
  Top 0.152: Q1.1 12.28,15.67 R2.1 15.43,15.67 15.72,15.38 15.72,13.92 13.19,11.39 13.19,7.74 14.02,6.92 17.73,6.92 R1.1
N$14
  Top 0.152: D2.2 119.86,55.07 120.22,54.72 120.22,52.02 120.42,51.82 D5.4
N$15
  Top 0.152: Q1.2 10.29,18.27 K1.4
N$16  (via drill 0.35)
  Top 0.152: IC20.6 24.05,47.98 | 24.05,47.98 24.3,47.98 | 24.3,47.98 24.56,47.98 24.46,47.88 | 24.46,47.88 25.83,47.88 R25.1 26.29,47.42 26.62,47.42 27.96,46.07 C22.2 | R21.2 v8.74,42.79 11.92,39.61 19.62,39.61 20.12,40.11 20.12,45.01 v20.01,45.11 | v21.23,45.11 23.61,45.11 24.3,45.8 24.3,47.73 | 24.3,47.73 24.3,47.98 | 24.3,47.73 | 24.3,47.73 24.46,47.88 | 24.3,47.73 24.05,47.98
  Bottom 0.152: v20.01,45.11 v21.23,45.11
N$17  (via drill 0.35)
  Top 0.152: R21.1 C23.2
  other vias: 5.67,39.97
N$18
  Top 0.152: C23.1 5.69,37.19 4.02,35.52 4.02,33.52 4.81,32.72 POT20.2
N$19
  Bottom 0.305: BT2.1 135.67,38.27 137.02,36.91 IC1.14
N$20
  Bottom 0.152: IC1.3 137.02,24.12 136.68,23.78 133.2,23.78 132.89,23.47 R18.2
N$21
  Bottom 0.152: 139.52,25.87 IC1.1 139.54,25.89 139.54,20.98 139.22,20.67 135.57,20.67 135.24,21 135.24,22.13 R17.2
N$22  (via drill 0.35)
  other vias: 43.12,23.02
N$23  (via drill 0.35)
  Top 0.305: C2.2 124.33,36.36 v124.33,37
  Bottom 0.305: BT2.2 115.67,37.55 116.21,37 v124.33,37
N$25
  Top 0.152: D4.C 124.92,16.09 R5.1
N$26
  Top 0.152: R8.1 IC2.1
NSS
  Top 0.152: U1.15 130.92,39.5 130.92,42.72 130.62,43.02 117.32,43.02 117.07,42.77 117.07,40.71 U3.27
OUT-A
  Top 0.152: POT20.1 8.04,35.26 11.89,39.11 19.62,39.11 20.62,40.11 20.62,50.62 21.52,51.52 23.02,51.52 23.54,52.04 R24.2
POS-A  (via drill 0.35)
  Top 0.152: 13,49.3 11.66,49.3 R27.2 | 13,49.3 13.25,49.3 | 13.25,49.3 13.49,49.3 | 13.49,49.3 R26.1 16.11,47.98 IC20.3 | v13.25,45.67 13.25,49.04 | 13.25,49.3 13.25,49.04 | 13.25,49.04 13,49.3 | 13.25,49.04 13.49,49.28 13.49,49.3
  Bottom 0.152: T20.4 13.62,29.83 R22.2 12.22,36.78 12.22,44.64 v13.25,45.67
POS-B
  Top 0.152: IC20.5 22.63,46.65 21.63,46.65 21.21,47.08 21.21,49.53 21.51,49.83 27.13,49.83 R28.1 29.21,49.62 R29.2
PWM_DIM
  Top 0.152: R8.2 128.9,21.13 128.22,21.82 121.51,21.82 U3.14
RESET
  Top 0.152: U1.4 135.02,27.22 134.57,27.66 U3.16
RX0
  Top 0.152: U3.34 108.28,46.88 108.9,47.5 JP3.1
SCK
  Top 0.152: U1.12 136.92,39.5 136.92,42.72 135.42,44.22 114.56,44.22 113.32,42.97 113.32,40.66 U3.30
SCL
  Bottom 0.152: IC1.16 139.56,33.46 139.12,33.02 124.72,33.02 124.18,32.48 U2.6 124.18,28.65 124.53,28.3 128.08,28.3 128.42,27.97 128.42,24.19 129.09,23.51 130.14,23.51 130.48,23.17 R19.2
SDA
  Bottom 0.152: IC1.15 138.29,33.79 137.92,33.42 123.52,33.42 122.91,32.81 U2.5 122.92,29.42 124.37,27.97 127.78,27.97 128.04,27.71 R30.2
TX0
  Top 0.152: U3.35 107.01,42.52 106.72,42.82 104.72,42.82 104.52,43.01 JP3.6
V  (via drill 0.35)
  Top 0.406: v23.02,21.02 v23.02,21.01 23.02,19.92
  Top 2.54: K1.2 23.02,19.92 23,24.9 NEMA-7PIN.V
  Bottom 2.54: K1.2 23.03,23.5 23.02,23.52
VIN  (via drill 0.35)  (2 unrouted)
  Top 0.152: 117.72,10.62 124.52,10.62 125.02,11.12 R16.2 | 117.93,15 | 117.93,15 117.47,14.55 | 117.93,15 117.93,20.13 118.42,20.62 R12.2
  Top 0.2: 117.72,10.62 117.42,10.92 117.42,13.4
  Top 0.254: D5.1 125.08,50.62 119.09,50.62 119.05,50.65
  Top 0.406: v119.02,50.62 119.05,50.65 D2.1
  Bottom 0.406: v113.92,14.32 114.33,14.73 114.33,47.93 117.02,50.62 v119.02,50.62
(copper drawn outside any net)
  shapes: Top area x2